# Altium PCB TestBoard.PcbDoc
Units mil, origin at the board's own origin, x right, y up, seen from the top; angles counter-clockwise.
Board outline 3060.02 x 2783.13 mil, 2 copper layers (Top Layer, Bottom Layer); 50 components, 37 nets, 135 pads, 53 vias.
Unrouted connection lines stored in the file: 1.
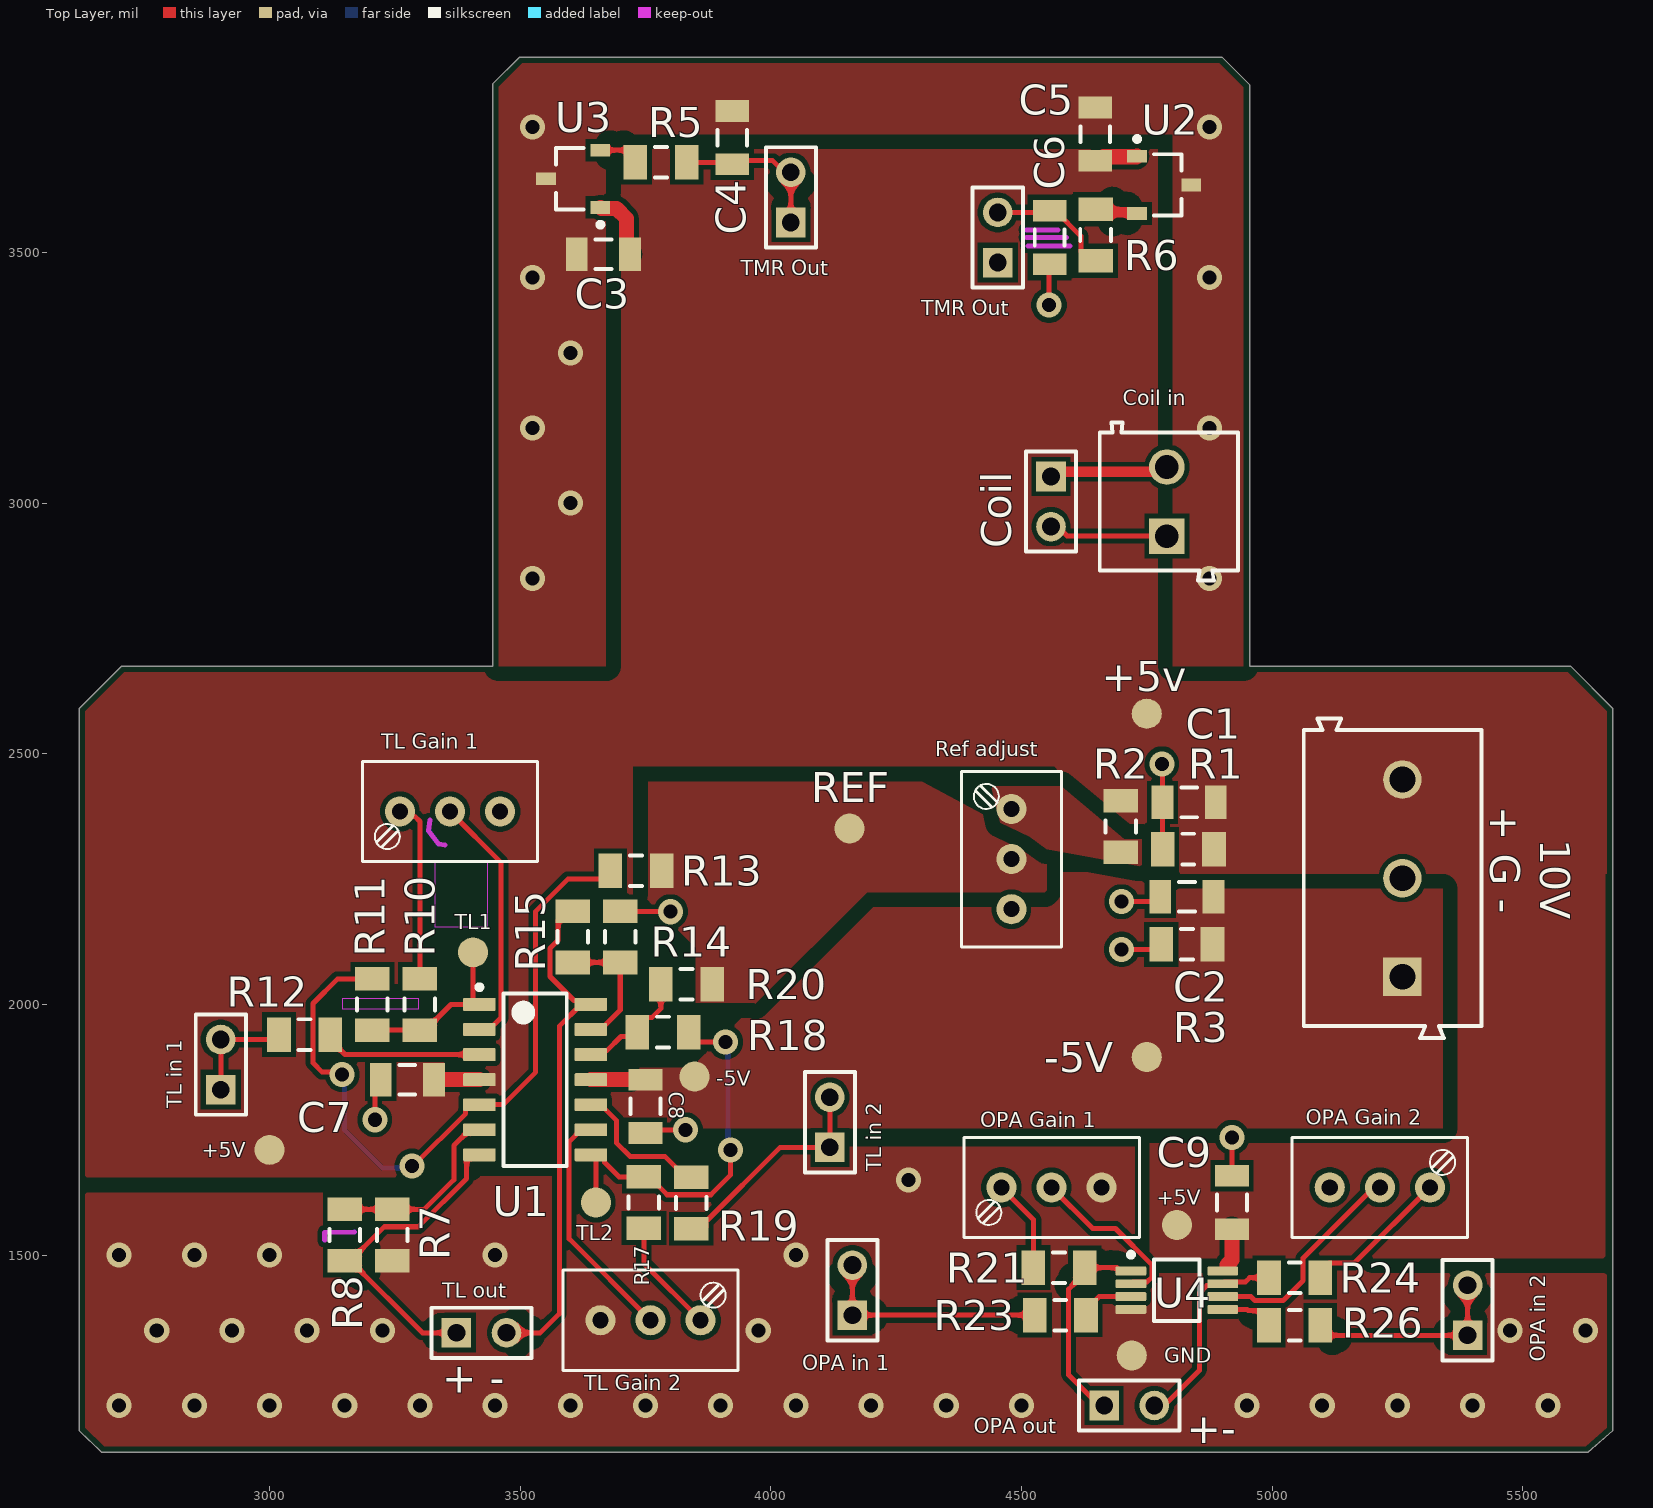
[diagram p0: Top Layer view]
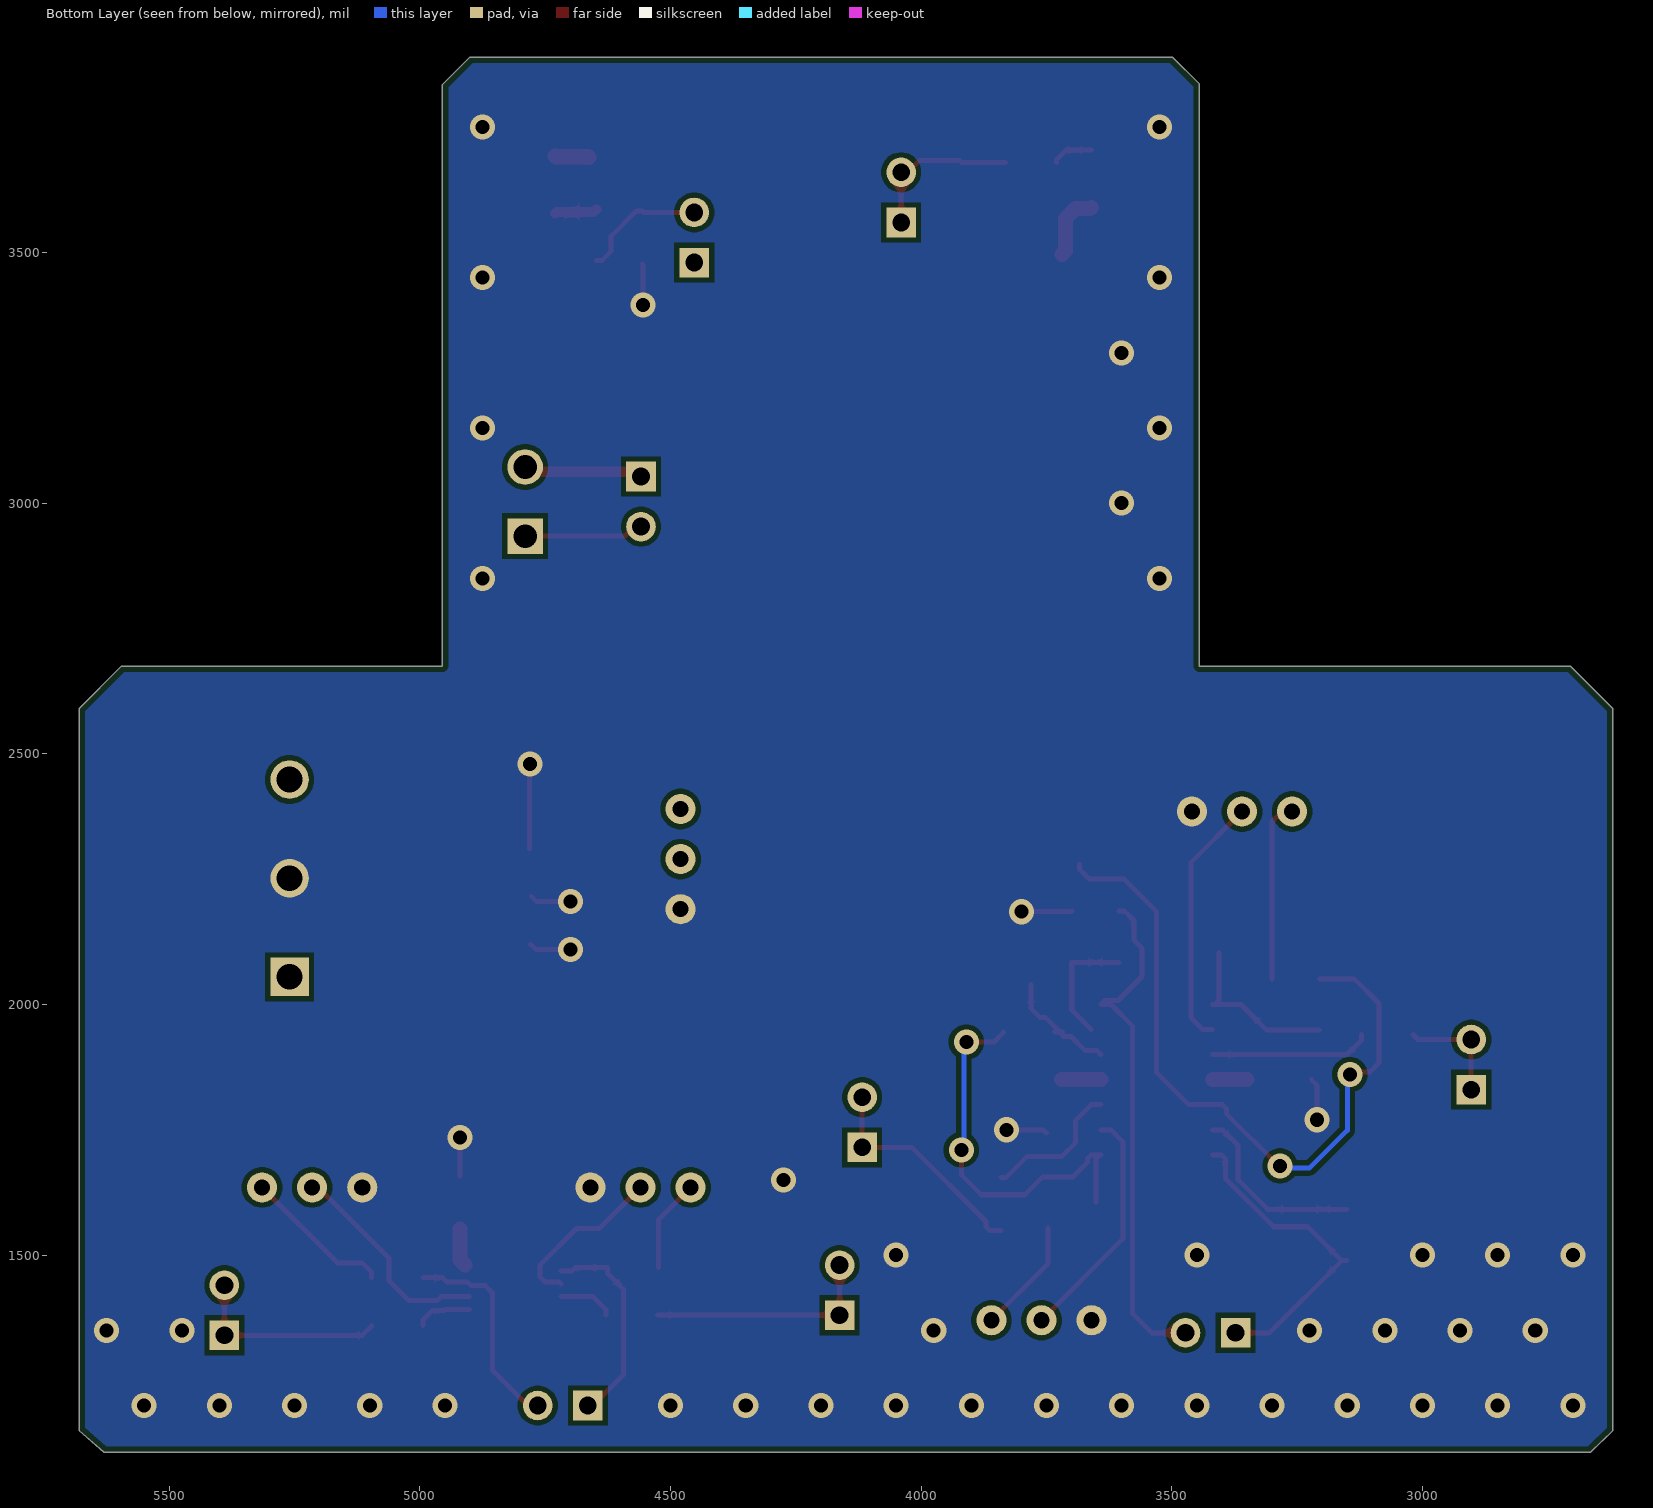
[diagram p1: Bottom Layer view, seen from below]

## Layer stack, top to bottom
Top Solder: solder mask 0.4, Solder Resist, Dk 3.5
Top Layer: signal copper 1.4
Dielectric 1: dielectric 12.6, FR-4, Dk 4.8
Bottom Layer: signal copper 1.4
Bottom Solder: solder mask 0.4, Solder Resist, Dk 3.5

## Board outline
5680,2590 5595,2675 4955,2675 4955,3300 4955,3835 4900,3890 3499,3890 3445,3836 3445,3325 3445,2675 2705,2675 2620,2590 2619.98,1155 2619.98,1150.02 2665.01,1106.87 5603,1106.87 5630,1106.87 5680,1150.02

## Design rules (kind name [scope] priority, off if disabled: settings)
BoardOutlineClearance [All] p1: gap=11.81 ignorepadtopadclearanceinfootprint=FALSE
Clearance "Stitching +5" [IsStitchingVia and InNet('+5') vs (IsVia and (Not IsStitchingVia)) Or IsPad] p1: gap=10 ignorepadtopadclearanceinfootprint=FALSE
Clearance [All] p2: gap=10 ignorepadtopadclearanceinfootprint=FALSE except(0: Arc-Hole Track-Hole SMDPad-Hole THPad-Hole Via-Hole Fill-Hole Poly-Hole Region-Hole Text-Hole; 6: Arc-Arc Arc-Track Arc-SMDPad Arc-THPad Arc-Via Track-Track Track-SMDPad Track-THPad Track-Via SMDPad-SMDPad SMDPad-THPad SMDPad-Via THPad-THPad THPad-Via Via-Via; 30: Fill-Fill Fill-Poly Fill-Region Poly-Poly Poly-Region Region-Region)
HoleSize [All] p1: absolutevalues=TRUE maxlimit=216.54 minlimit=11.81 maxpercent=80.000 minpercent=20.000
PlaneConnect [All] p1: planeconnectstyle=Direct reliefexpansion=20 reliefentries=4 reliefconductorwidth=10 reliefairgap=10
PolygonConnect [All] p1: connectstyle=Direct reliefconductorwidth=10 reliefentries=4 polygonreliefangle="90 Angle" airgapwidth=10
RoutingVias [All] p1: holewidth=28 width=50 viastyle="Through Hole" minholewidth=28 minwidth=50 maxholewidth=28 maxwidth=50
SolderMaskExpansion [All] p1: expansion=4 istentingtop=FALSE
Width [All] p1: maxlimit=100 minlimit=10 preferedwidth=10 bottomlayer_maxwidth=10 minimp=50.000000 maximp=50.000000 favimp=50.000000
28 further rules are at their usual default settings.

## Classes and differential pairs
component class TL074: C7 C8 R7 R8 R10 R11 R12 R13 R14 R15 R17 R18 R19 R20 "TL Gain 1" "TL Gain 2" U1
component class Test_Board: "+ G -" C1 C2 C3 C4 C5 C6 Coil "Coil in" "OPA in 1" "OPA in 2" "OPA out" R1 R2 R3 R5 R6 "Ref adjust" "TL in 1" "TL in 2" "TL out" "TMR Out" U2 U3
component class OPA2342: C9 "OPA Gain 1" "OPA Gain 2" R21 R23 R24 R26 U4

## Components (designator, comment, footprint, x,y, rotation, side; value= is the part's Value field where it differs from the comment)
"+ G -" "691101710003" 691101710003 5240.31,2251.86 r90 top (schematic designator J1)
C1 "Cap" C1206 4834.53,2402.95 r180 top value=220u
C2 "Cap" C1206 4830.06,2215 r0 top value=220u
C3 "Cap" C1206 3666,3496.33 r180 top value=1uf
C4 "Cap" C1206 3923,3729 r90 top value=100pf
C5 "Cap" C1206 4647,3736 r90 top value=1uf
C6 "Cap" C1206 4556.08,3530 r270 top value=100pf
C7 "Cap" C1206 3274.82,1850 r180 top value=0.1u
C8 "Cap" C1206 3750,1796.85 r270 top value=0.1u
C9 "Cap" C1206 4920,1605 r90 top value=0.1u
Coil "Header 2" HDR1X2 4559,3053.23 r270 top locked (schematic designator P9)
"Coil in" "691103110002" 691103110002 4794,3003.23 r90 top (schematic designator J2)
"OPA Gain 1" "THTRIM-GENERIC" TRIMMER-MT 4660,1635 r180 top (schematic designator TR4)
"OPA Gain 2" "THTRIM-GENERIC" TRIMMER-MT 5115,1635 r0 top (schematic designator TR5)
"OPA in 1" "Header 2" HDR1X2 4162.77,1380 r90 top (schematic designator P6)
"OPA in 2" "Header 2" HDR1X2 5390,1340 r90 top (schematic designator P8)
"OPA out" "Header 2" HDR1X2 4665,1200 r0 top (schematic designator P7)
R1 "4.7k" RESC3216X89X51LL25T25 4832.77,2310 r0 top
R2 "10k" RESC3216X89X51LL25T25 4697.77,2355 r90 top
R3 "4.7k" RESC3216X89X51LL25T25 4830.06,2120 r180 top
R5 "47k" RESC3216X89X51LL25T25 3781.05,3680 r180 top
R6 "47k" RESC3216X89X51LL25T25 4647.79,3535 r90 top
R7 "100k" RESC3216X89X51LL25T25 3245,1540 r270 top
R8 "100k" RESC3216X89X51LL25T25 3150.34,1540 r90 top
R10 "150k" RESC3216X89X51LL25T25 3300,2000 r90 top
R11 "100k" RESC3216X89X51LL25T25 3205,2000 r270 top
R12 "10k" RESC3216X89X51LL25T25 3070,1940 r180 top
R13 "100k" RESC3216X89X51LL25T25 3731.18,2267.06 r0 top
R14 "100k" RESC3216X89X51LL25T25 3699.66,2135 r90 top
R15 "100k" RESC3216X89X51LL25T25 3605,2135 r270 top
R17 "150k" RESC3216X89X51LL25T25 3746.62,1605 r270 top
R18 "100k" RESC3216X89X51LL25T25 3785,1945 r0 top
R19 "10k" RESC3216X89X51LL25T25 3841.27,1603.82 r270 top
R20 "100k" RESC3216X89X51LL25T25 3831.71,2040 r0 top
R21 "150k" RESC3216X89X51LL25T25 4575,1475 r180 top
R23 "10k" RESC3216X89X51LL25T25 4577.55,1380.34 r180 top
R24 "150k" RESC3216X89X51LL25T25 5045,1455 r0 top
R26 "10k" RESC3216X89X51LL25T25 5045,1360 r0 top
"Ref adjust" "THTRIM-GENERIC" TRIMMER-MT 4480,2190 r90 top (schematic designator TR1)
"TL Gain 1" "THTRIM-GENERIC" TRIMMER-MT 3460,2385 r180 top (schematic designator TR2)
"TL Gain 2" "THTRIM-GENERIC" TRIMMER-MT 3660,1370 r0 top (schematic designator TR3)
"TL in 1" "Header 2" HDR1X2 2902.77,1830 r90 top locked (schematic designator P3)
"TL in 2" "Header 2" HDR1X2 4117.77,1715 r90 top locked (schematic designator P5)
"TL out" "Header 2" HDR1X2 3372.77,1345 r0 top locked (schematic designator P4)
"TMR Out" "Header 2" HDR1X2 4040,3560 r90 top (schematic designator P2)
"TMR Out" "Header 2" HDR1X2 4452.77,3480 r90 top (schematic designator P1)
U1 "TL074CD" D0014A_M 3529.91,1850 r0 top
U2 "RR112-1G42-531" SOT145P280X140-3N 4784.76,3635 r0 top
U3 "RR112-1G42-531" SOT145P280X140-3N 3605.87,3647.09 r180 top
U4 "OPA2342EA/250" DGK0008A_M 4810,1430 r0 top

## Footprints (in the part's own frame and the unit in brackets; to place one, negate y for a bottom-side part, rotate by r counter-clockwise, add the part's x,y. Pads: shape width x height; smd on the part's side, far side on the other; paste and mask are expansions set on the pad)
691101710003 [mm] "5,00mm - modular - blue - Horizontal entry with pressure clamp - 12,6mm height - 03p"
  rect 1.95x1.95 hole 1.3: 1(-5,-0.5)
  round 1.95 hole 1.3: 2(0,-0.5) 3(5,-0.5)
  silkscreen extent -8.1,-4.5 8.1,4.5, body extent -8.1,-4.5 8.1,4.5, height 12.65
691103110002 [mm] "3,50mm - modular - blue - Horizontal wire entry - Pressure clamp - 8,4mm height - 02p"
  rect 1.8x1.8 hole 1.2: 1(-1.75,0.1)
  round 1.8 hole 1.2: 2(1.75,0.1)
  silkscreen extent -4,-3.5 4,3.5, body extent -4,-3.5 4,3.5, height 8.45
C1206 [mm] "Chip Capacitor, Body 3.2x1.6mm, IPC High Density"
  rect 1.1x1.7 smd: 1(-1.35,0) 2(1.35,0)
  silkscreen extent -0.4,-0.75 0.4,0.75, body extent -1.7,-0.9 1.7,0.9, height 1.3
D0014A_M [mm] "SOIC, 14-Leads, Body 8.75x4mm, Pitch 1.27mm, IPC Low Density"
  rrect15% 1.65x0.65 smd: 1(-2.825,3.81) 2(-2.825,2.54) 3(-2.825,1.27) 4(-2.825,0) 5(-2.825,-1.27) 6(-2.825,-2.54) 7(-2.825,-3.81) 8(2.825,-3.81) 9(2.825,-2.54) 10(2.825,-1.27) 11(2.825,0) 12(2.825,1.27) 13(2.825,2.54) 14(2.825,3.81)
  silkscreen extent -2.95,-4.37 1.6,4.81, body extent -3.02,-4.32 3.02,4.32, height 1.59
DGK0008A_M [mm] "TSOP, 8-Leads, Body 3.1x3.1mm, Pitch 0.65mm, IPC Low Density"
  rrect22% 1.55x0.45 smd: 1(-2.325,0.975) 2(-2.325,0.325) 3(-2.325,-0.325) 4(-2.325,-0.975) 5(2.325,-0.975) 6(2.325,-0.325) 7(2.325,0.325) 8(2.325,0.975)
  silkscreen extent -2.45,-1.55 1.15,1.92, body extent -2.45,-1.5 2.45,1.5, height 0.94
HDR1X2 [mm] "Connector; Header; 2 Position"
  rect 1.5x1.5 hole 0.9: 1(0,0)
  round 1.5 hole 0.9: 2(2.54,0)
  silkscreen extent -1.27,-1.27 3.81,1.27
RESC3216X89X51LL25T25 [mm] "Chip Resistor, 2-Leads, Body 3.20x1.60mm, IPC High Density"
  rect 1.2x1.75 smd: 1(-1.3,0) 2(1.3,0)
  silkscreen extent -0.3,-0.78 0.3,0.78, body extent -1.73,-0.92 1.73,0.92, height 0.89
SOT145P280X140-3N [mm] "SOT23, 3-Leads, Body 2,90x2,80mm, Pitch 1,45mm, IPC Medium Density"
  rect 1x0.65 smd: 1(-1.375,1.45) 2(-1.375,-1.45) 3(1.375,0)
  silkscreen extent -1.5,-1.55 0.88,2.45, body extent -0.88,-1.53 0.87,1.53, height 1.4
TRIMMER-MT [mil]
  round 60 hole 32: 1(0,0) 2(200,0) W(100,0)
  silkscreen extent -75,-100 275,100

## Part data
"+ G -": library part CMP-1502-03257-1, "Series 101 - 5.00 mm Horizontal Entry Modular with Pressure Clamp WR-TBL, 3 pin", Manufacturer="Wurth Elektronik", Operating Temperature=-40to105degC, Datasheet URL=http://katalog.we-online.de/em/datasheet/6911017100xx.pdf, Manufacturer URL=http://www.we-online.de, Mounting Technology=THT, Package Reference=691101710003, Packaging=Box, Part Number=691101710003, Pin Number=3, Pitch=5.00mm, Publisher=WurthElektronik
C1 C2 C3 C4 C5 C6 C7 C8 C9: "Capacitor", LatestRevisionDate=17-Jul-2002, LatestRevisionNote="Re-released for DXP Platform.", PackageDescription="Radial Cap, Thru-Hole; 2 Leads; 0.3 in Pin Spacing", PackageReference=RAD-0.3, Published=8-Jun-2000, Publisher="Altium Limited"
Coil "OPA in 1" "OPA in 2" "OPA out" "TL in 1" "TL in 2" "TL out" "TMR Out" "TMR Out": "Header, 2-Pin", LatestRevisionDate=17-Jul-2002, LatestRevisionNote="Re-released for DXP Platform.", Publisher="Altium Limited"
"Coil in": library part CMP-1502-03254-1, "Series 1031 - 3.50 mm Horizontal Entry Modular with Pressure Clamp WR-TBL, 2 pin", Manufacturer="Wurth Elektronik", Operating Temperature=-40to105degC, Datasheet URL=http://katalog.we-online.de/em/datasheet/6911031100xx.pdf, Manufacturer URL=http://www.we-online.de, Mounting Technology=THT, Package Reference=691103110002, Packaging=Box, Part Number=691103110002, Pin Number=2, Pitch=3.50mm, Publisher=WurthElektronik
"OPA Gain 1" "OPA Gain 2" "Ref adjust" "TL Gain 1" "TL Gain 2": "TRIMMABLE RESISTOR"
R1 R2 R3 R5 R6 R7 R8 R10 R11 R12 R13 R14 R15 R17 R18 R19 R20 R21 R23 R24 R26: library part CMP-2003-04376-1, Manufacturer="Vishay Dale", Part Number=WSLP1206R0500FEA
U1: library part CMP-0017-00005-2, "Quad Low-Noise JFET-Input General-Purpose Operational Amplifier, 7 to 36 V, 0 to 70 degC, 14-pin SOIC (D14), Green (RoHS & no Sb/Br)", Manufacturer="Texas Instruments", Rating=Military, Total Supply Voltage(Max)(+5V is 5, +/-5V is 10)=36, Total Supply Voltage(Min)(+5V is 5, +/-5V is 10)=7, CMRR(Min)(dB)=70, Code_JEDEC=MS-012, ComponentLink1Description="Manufacturer URL", ComponentLink1URL=http://www.ti.com/, ComponentLink2Description=Datasheet, ComponentLink2URL=http://www.ti.com/lit/ds/symlink/tl074.pdf, ComponentLink3Description="Package Specification", ComponentLink3URL=http://www.ti.com/lit/ml/mpds177g/mpds177g.pdf, DatasheetVersion=SLOS080J, Eco-Plan="Green (RoHS & no Sb/Br)", GBW(Typ)(MHz)=3, IIB(Max)(pA)=200, Iq per channel(Max)(mA)=2.5, Mounting Technology="Surface Mount", Number of Channels=4, Offset Drift(Typ)(uV/C)=18, PackageDescription="14-Pin Plastic Small Outline, Body 8.65 x 3.90 mm, Pitch 1.27 mm", PackageReference=D0014A, PackageVersion="4040047-5/M, 06/2011", PartNumber=TL074CD, Slew Rate(Typ)(V/us)=13, Sub Family="General Purpose Amplifier, High Supply Voltage Amplifier (>=30V)", Vio (25C)(Max)(mV)=10, Vn at 1kHz(Typ)(nV/rtHz)=18
U2 U3: library part CMP-010-0002465-1, "TMR Sensor"
U4: library part CMP-0271-00302-3, "Low Cost, Low Power, Rail-to-Rail Operational Amplifier MicroAmplifier(TM) Series, 2.7 to 5.5 V, -40 to 85 degC, 8-pin SOP (DGK8), Green (RoHS & no Sb/Br)", Manufacturer="Texas Instruments", Rating=Catalog, Total Supply Voltage(Max)(+5V is 5, +/-5V is 10)=5.5, Total Supply Voltage(Min)(+5V is 5, +/-5V is 10)=2.7, CMRR(Min)(dB)=74, Code_JEDEC=MO-187, ComponentLink1Description="Manufacturer URL", ComponentLink1URL=http://www.ti.com/, ComponentLink2Description=Datasheet, ComponentLink2URL=http://www.ti.com/lit/ds/symlink/opa2342.pdf, ComponentLink3Description="Package Specification", ComponentLink3URL=http://www.ti.com/litv/pdf/mpds028d, DatasheetVersion=SBOS106A, Eco-Plan="Green (RoHS & no Sb/Br)", GBW(Typ)(MHz)=1, IIB(Max)(pA)=10, Iq per channel(Max)(mA)=0.25, Mounting Technology="Surface Mount", Number of Channels=2, Offset Drift(Typ)(uV/C)=3, PackageDescription="8-Pin Thin Small Outline, Body 3 x 3 mm, Pitch 0.65 mm", PackageReference=DGK0008A, PackageVersion="4073329/E, 05/2006", Packing="SMALL T&R", PartNumber=OPA2342EA/250, Slew Rate(Typ)(V/us)=1, Sub Family="Low Input Bias Current Amp (<=10pA), Low Power Amp (<=500uA), Low Supply Voltage Amplifier (<=2.7V), Precision Amplifier", Vio (25C)(Max)(mV)=6

## Free pads (board coordinates)
  round 60 smd: 15(3406,2104) 16(3651,1605) 17(3000,1710) 18(3848,1856) 19(4810,1560) 20(4750,2580) 21(4750,1895) 22(4720,1300) ref(4157,2351)

## Via types
v1: diameter 50, hole 28, Top Layer to Bottom Layer, 53 vias

## Nets (pads, with @x,y where several pads share a name; then routed paths per layer and width w, separated by ;. In a path a pad name is that pad's centre, name@x,y a point inside that pad or via, vN(x,y) a via of type N, cw(c..) or ccw(c..) an arc to the next point about the centre after c; other vN are vias at no path point)
+5: "+ G -.3" C1.1 C3.1 C5.1 C7.1 C9.1 pad.17 pad.19 pad.20 R1.2 R2.2 U1.4 U2.1 U3.1 U4.8 | length 349.4
  Top Layer w30: 3350,1850 U1.4 ; U3.1 3662.2,3587.8 3692.2,3587.8 3712.5,3567.5 3712.5,3502.98 C3.1 ; C5.1@4662.55,3690 4663.59,3691.04 4729.59,3691.04 U2.1 ; 4910,1480 4920,1490 C9.1
-5: "+ G -.1" C2.2 C8.1 pad.18 pad.21 R3.1 U1.11 | length 78.9
  Top Layer w30: U1.11 C8.1@3720,1850
GND: "+ G -.2" "OPA Gain 1.1" "OPA Gain 2.1" "Ref adjust.1" "TL Gain 1.1" "TL Gain 2.1" C1.2 C2.1 C3.2 C4.2 C5.2 C6.2 C7.2 C8.2 C9.2 pad.22 R1.1 R3.2 R7.2 R14.2 U2.3 U3.3 U4.4 | length 762.2
  Top Layer w10: v1(3210,1770) 3210,1838.33 C7.2 ; R14.2 3700.84,2185 v1(3800,2185) ; C8.2 3756.3,1750 v1(3830,1750) ; v1(4555,3395) 4555,3475.77 C6.2 ; v1(4700,2110) 4768.88,2110 R3.2 ; v1(4700,2205) 4766.91,2205 C2.1 ; v1(4780,2480) 4781.38,2478.62 C1.2 4781.58,2402.75 R1.1 ; C9.2 v1(4920,1735)
  other v1: 2700,1200 2850,1200 3000,1200 3150,1200 3300,1200 3450,1200 3600,1200 3750,1200 3900,1200 4050,1200 4200,1200 4350,1200 4500,1200 4950,1200 5100,1200 5250,1200 5400,1200 5550,1200 2775,1350 2925,1350 3075,1350 3225,1350 3975,1350 5475,1350 5625,1350 2700,1500 2850,1500 3000,1500 3450,1500 4050,1500 4275,1650 3525,2850 4875,2850 3600,3000 3525,3150 4875,3150 3600,3300 3525,3450 4875,3450 3525,3750 4875,3750
NetC4_1: "TMR Out.1"@4040,3560 "TMR Out.2"@4040,3660 C4.1 R5.1 | length 318.7
  Top Layer w10: R5.1 3919.08,3680 3922.23,3683.15 4003.58,3683.15 4026.73,3660 4040,3660 4040,3560
NetC6_1: "TMR Out.1"@4452.77,3480 "TMR Out.2"@4452.77,3580 C6.1 R6.1 | length 255.2
  Top Layer w10: 4452.77,3580 4552.93,3580 C6.1 4567.89,3583.15 4618.34,3532.71 4618.34,3502.44 4636.96,3483.82 R6.1
NetJ2_1: "Coil in.1" Coil.2 | length 238.9
  Top Layer w10: Coil.2 4572.27,2953.23 4591.17,2934.34 4790.06,2934.34
NetJ2_2: "Coil in.2" Coil.1 | length 238.9
  Top Layer w20: Coil.1 4568.45,3062.68 4780.61,3062.68 4790.06,3072.13
NetP3_1: "TL in 1.1" "TL in 1.2" R12.2 | length 220.2
  Top Layer w10: 2902.77,1830 2902.77,1930 3008.82,1930 R12.2
NetP4_1: "TL out.1" R8.1 U1.7 | length 650.1
  Top Layer w10: R8.1 R8.1@3161.17,1488.82 ; 3372.77,1345 3304.99,1345 R8.1@3161.17,1488.82 ; U1.7 3400.93,1700 3393.13,1692.2 3393.13,1652.75 3296.94,1556.56 3228.91,1556.56 R8.1@3161.17,1488.82
NetP4_2: "TL out.2" R15.1 U1.14 | length 1036
  Top Layer w10: 3472.77,1345 3540,1345 3578,1383 3578,1956.55 3621.45,2000 U1.14 3633.34,2007.8 3607.4,2007.8 3559.55,2055.64 3559.55,2112 3575.55,2128 3575.55,2167.56 3594.17,2186.18 R15.1
NetP5_1: "TL in 2.1" "TL in 2.2" R19.2 | length 451.7
  Top Layer w10: R19.2@3841.27,1548.82 3863.28,1548.82 3870.72,1556.26 3870.72,1567.09 4018.63,1715 4117.77,1715 4117.77,1815
NetP6_1: "OPA in 1.1" "OPA in 1.2" R23.2 | length 463.7
  Top Layer w10: 4162.77,1480 4162.77,1380 4163.11,1380.34 R23.2
NetP7_1: "OPA out.1" R21.1 U4.1 | length 422.7
  Top Layer w10: 4665,1190 4594.11,1260.89 4594.11,1432.1 4626.18,1464.17 R21.1 4690.2,1475 4696.81,1468.39 U4.1
NetP7_2: "OPA out.2" R24.1 U4.7 | length 429.1
  Top Layer w10: 4765,1190 4775,1190 4855,1270 4855,1424.45 4869.48,1438.94 4897.68,1438.94 4905.39,1446.65 4946.85,1446.65 4955.2,1455 R24.1
NetP8_1: "OPA in 2.1" "OPA in 2.2" R26.2 | length 402.9
  Top Layer w10: R26.2 5096.18,1358.62 5114.8,1340 5390,1340 5390,1440
NetR2_1: "Ref adjust.2" R2.1
NetR5_2: R5.2 U3.2 | length 83.1
  Top Layer w10: U3.2 3711.25,3704.17 3729.87,3685.55 R5.2
NetR6_2: R6.2 U2.2 | length 86.3
  Top Layer w20: R6.2 4653.26,3580.71 4727.84,3580.71 U2.2
NetR7_1: R7.1 R8.2 U1.6 | length 374.4
  Top Layer w10: R8.2 R7.1 3308.93,1591.18 3367.78,1650.03 3367.78,1718.78 3399.01,1750 U1.6
NetR10_1: pad.15 R10.1 R11.2 U1.1 | length 342.1
  Top Layer w10: R11.2 3310.83,1948.82 3362.01,2000 U1.1@3413.8,2000 ; pad.15 3406,2007.8 U1.1@3413.8,2000 ; U1.1 U1.1@3413.8,2000
NetR10_2: "TL Gain 1.2" R10.2 | length 362.1
  Top Layer w10: 3260,2385 3269.57,2375.43 3289.57,2375.43 3300,2365 R10.2
NetR11_1: R11.1 R13.1 U1.5 | length 1454.6
  Top Layer w10: v1(3145,1860) 3140,1865 3105,1865 3086.56,1883.44 3086.56,2001.88 3135.86,2051.18 R11.1 ; v1(3284,1678) 3286.98,1678 3391.21,1782.23 3391.21,1792.2 3399.01,1800 3466.17,1800 3530.96,1864.79 3530.96,2185.76 3595.74,2250.55 3665.2,2250.55 3683.82,2269.17 R13.1@3683.82,2280
  Bottom Layer w10: v1(3145,1860) 3150,1855 3150,1749 3225,1674 3280,1674 v1(3284,1678)
NetR12_1: R12.1 U1.3 | length 320.4
  Top Layer w10: R12.1 3121.18,1929.17 3150.35,1900 U1.3
NetR14_1: R14.1 R15.2 U1.13 | length 244.6
  Top Layer w10: R15.2 R14.1 3699.66,1988.84 U1.13@3660.82,1950
NetR17_1: pad.16 R17.1 R18.2 U1.8 | length 782.9
  Top Layer w10: U1.8 U1.8@3643.2,1700 ; pad.16 3651,1692.2 U1.8@3643.2,1700 ; R18.2 3836.18,1943.62 3854.8,1925 v1(3910,1925) ; v1(3920,1710) 3920,1660.1 3880.28,1620.38 3793.25,1620.38 3757.44,1656.18 R17.1 3697.17,1656.18 3668.61,1684.74 3668.61,1692.2 3660.82,1700 U1.8@3643.2,1700
  Bottom Layer w10: v1(3910,1925) 3915,1920 3915,1715 v1(3920,1710)
NetR17_2: "TL Gain 2.2" R17.2 | length 230.8
  Top Layer w10: R17.2 3746.61,1483.39 3860,1370
NetR18_1: R18.1 R20.1 U1.12 | length 246.7
  Top Layer w10: U1.12 3648.93,1907.8 3672.8,1907.8 3701.05,1936.05 3715.2,1936.05 3718.23,1939.09 3718.23,1945 R18.1 ; R18.1@3718.23,1940.24 3752.44,1974.45 3763.27,1974.45 3780.53,1991.71 R20.1
NetR19_1: R19.1 U1.10 | length 286.5
  Top Layer w10: U1.10 3660.82,1800 3691.9,1768.92 3691.9,1724.06 3719.05,1696.91 3788.54,1696.91 3830.44,1655 R19.1
NetR21_2: "OPA Gain 1.2" R21.2 | length 186.4
  Top Layer w10: 4460,1635 4523.82,1571.18 R21.2
NetR23_1: R23.1 U4.3 | length 111.3
  Top Layer w10: R23.1 4628.73,1391.17 4654.76,1417.2 U4.3
NetR24_2: "OPA Gain 2.2" R24.2 | length 299.7
  Top Layer w10: R24.2 5096.18,1465.83 5114.8,1484.45 5164.45,1484.45 5315,1635
NetR26_1: R26.1 U4.5 | length 111.7
  Top Layer w10: U4.5 4950.04,1391.61 4952.2,1389.45 4975.2,1389.45 4993.82,1370.83 R26.1
NetTR2_W: "TL Gain 1.W" U1.2 | length 506.9
  Top Layer w10: 3360,2385 3462.17,2282.83 3462.17,1973.8 3438.38,1950 U1.2
NetTR3_W: "TL Gain 2.W" U1.9 | length 476.8
  Top Layer w10: U1.9 3621.45,1750 3597.65,1726.2 3597.65,1532.35 3760,1370
NetTR4_W: "OPA Gain 1.W" U4.2 | length 335.5
  Top Layer w10: 4560,1635 4641.95,1553.05 4687.59,1553.05 4759.98,1480.66 4759.98,1456.11 4750.52,1446.65 4722.32,1446.65 U4.2
NetTR5_W: "OPA Gain 2.W" U4.6 | length 436.3
  Top Layer w10: U4.6 4957.99,1417.2 4965.64,1409.55 5022,1409.55 5061.56,1449.11 5061.56,1494.01 5202.55,1635 5215,1635
REF: "Ref adjust.W" pad.ref R13.2 R20.2

## Polygon pours and split planes (outlines as drawn)
GND on Top Layer "GND_L01_P024" (solid, remove dead copper, pour order 24): 2632.03,1658.54 2632.03,1161.03 2629,1158 2667,1120 2667,1118 5627,1118 5668,1155 5668,1486.41 5660.41,1494 4756,1494 4756,1722.74 4749.26,1716 3596,1716 3596,1661 3592,1657
+5 on Top Layer "+5_L01_P017" (solid, remove dead copper, pour order 17): 3671,3319.32 3671,3720 3687,3736 4802,3736 4802,3295 4802,2668 5586,2668 5680,2574 5680,2261 4796,2261 4794,2259 4732,2321 4732,2348 4692,2348 4565,2475 3725,2475 3725,1969 3725,1655 2620,1655 2619.98,2589.98 2697,2667 3308,2667 3671,2667
+5 on Top Layer "+5_L01_P023" (solid, pour order 23): 5665,2283 5665,1495 5663,1493 5662,1494 4756,1494 4756,1752 4755,1753 5321,1753 5321,2283 5451,2283
-5 on Top Layer "-5_L01_P020" (solid, remove dead copper, pour order 20): 5340,2261.88 5340,1753 3608,1753 3599,1762 3603,1766 3603,1874 3842,1874 4192,2224 4546,2224 4546,2242 4568,2264
REF on Top Layer "REF_L01_P019" (solid, remove dead copper, pour order 19): 4550,2310 4550,2228 4546,2224 4192,2224 3969,2001 3967,2003 3850,2003 3850,2113 3728,2235 3728,2316 3725,2316 3725,2475 4244,2475 4245,2476
GND on Top Layer "GND_L01_P016" (solid, remove dead copper, pour order 16): 3445,2675 3671,2675 3671,3720 3687,3736 4802,3736 4802,3312 4802,2675 4953,2675 4953,3876 4940,3889 3437,3889
NetR2_1 on Top Layer "NETR2_1_L01_P010" (solid, pour order 10): 4440.26,2435 4457.5,2362.5 4516.07,2335 4550,2310 4740,2275 4740,2330 4705,2330 4579,2435
GND on Bottom Layer "GND_L02_P022" (solid, pour order 22): 2497,4005 2435,3943 2435,935 5993,935 5885,1043 5885,4099

## Keep-outs
Top Layer:
  rectangle: 3330,2155 3435,2285
  rectangle: 3145,1991.84 3297.35,2010.99
  lines w10: 3110.15,1529.71 3110,1545 3169.54,1545.6 ; 3320.39,2367.81 3317.34,2346.44 3337.07,2320.13 3350.25,2318.25 ; 4510,3530 4590,3530 ; 4510,3545.29 4572.94,3545.29 ; 4512.62,3513.5 4596.87,3513.5

## Silkscreen, mask and mechanical layers (free items; w line width, h text height)
Top Overlay:
  text "+5v" at 4660,2625 h60
  text "REF" at 4081,2403 h60
  text "10V" at 5535,2330 h60 r270
  text "TL1" at 3369,2150 h30
  text "-5V" at 4545,1865 h60
  text "-5V" at 3891,1838 h30
  text "+5V" at 2865,1695 h30
  text "+5V" at 4770,1600 h30
  text "TL2" at 3612,1530 h30
  text "GND" at 4785,1285 h30
  text "+ -" at 3345,1225 h60
  text "+-" at 4830,1125 h60